# Altium PCB Dash PCB_2020-06-07_18-45-49.pcbdoc
Units mil, origin at the board's own origin, x right, y up, seen from the top; angles counter-clockwise.
Board outline 47335.22 x 35087.44 mil, 2 copper layers (Top Layer, Bottom Layer); 7 components, 14 nets, 54 pads, 15 vias.
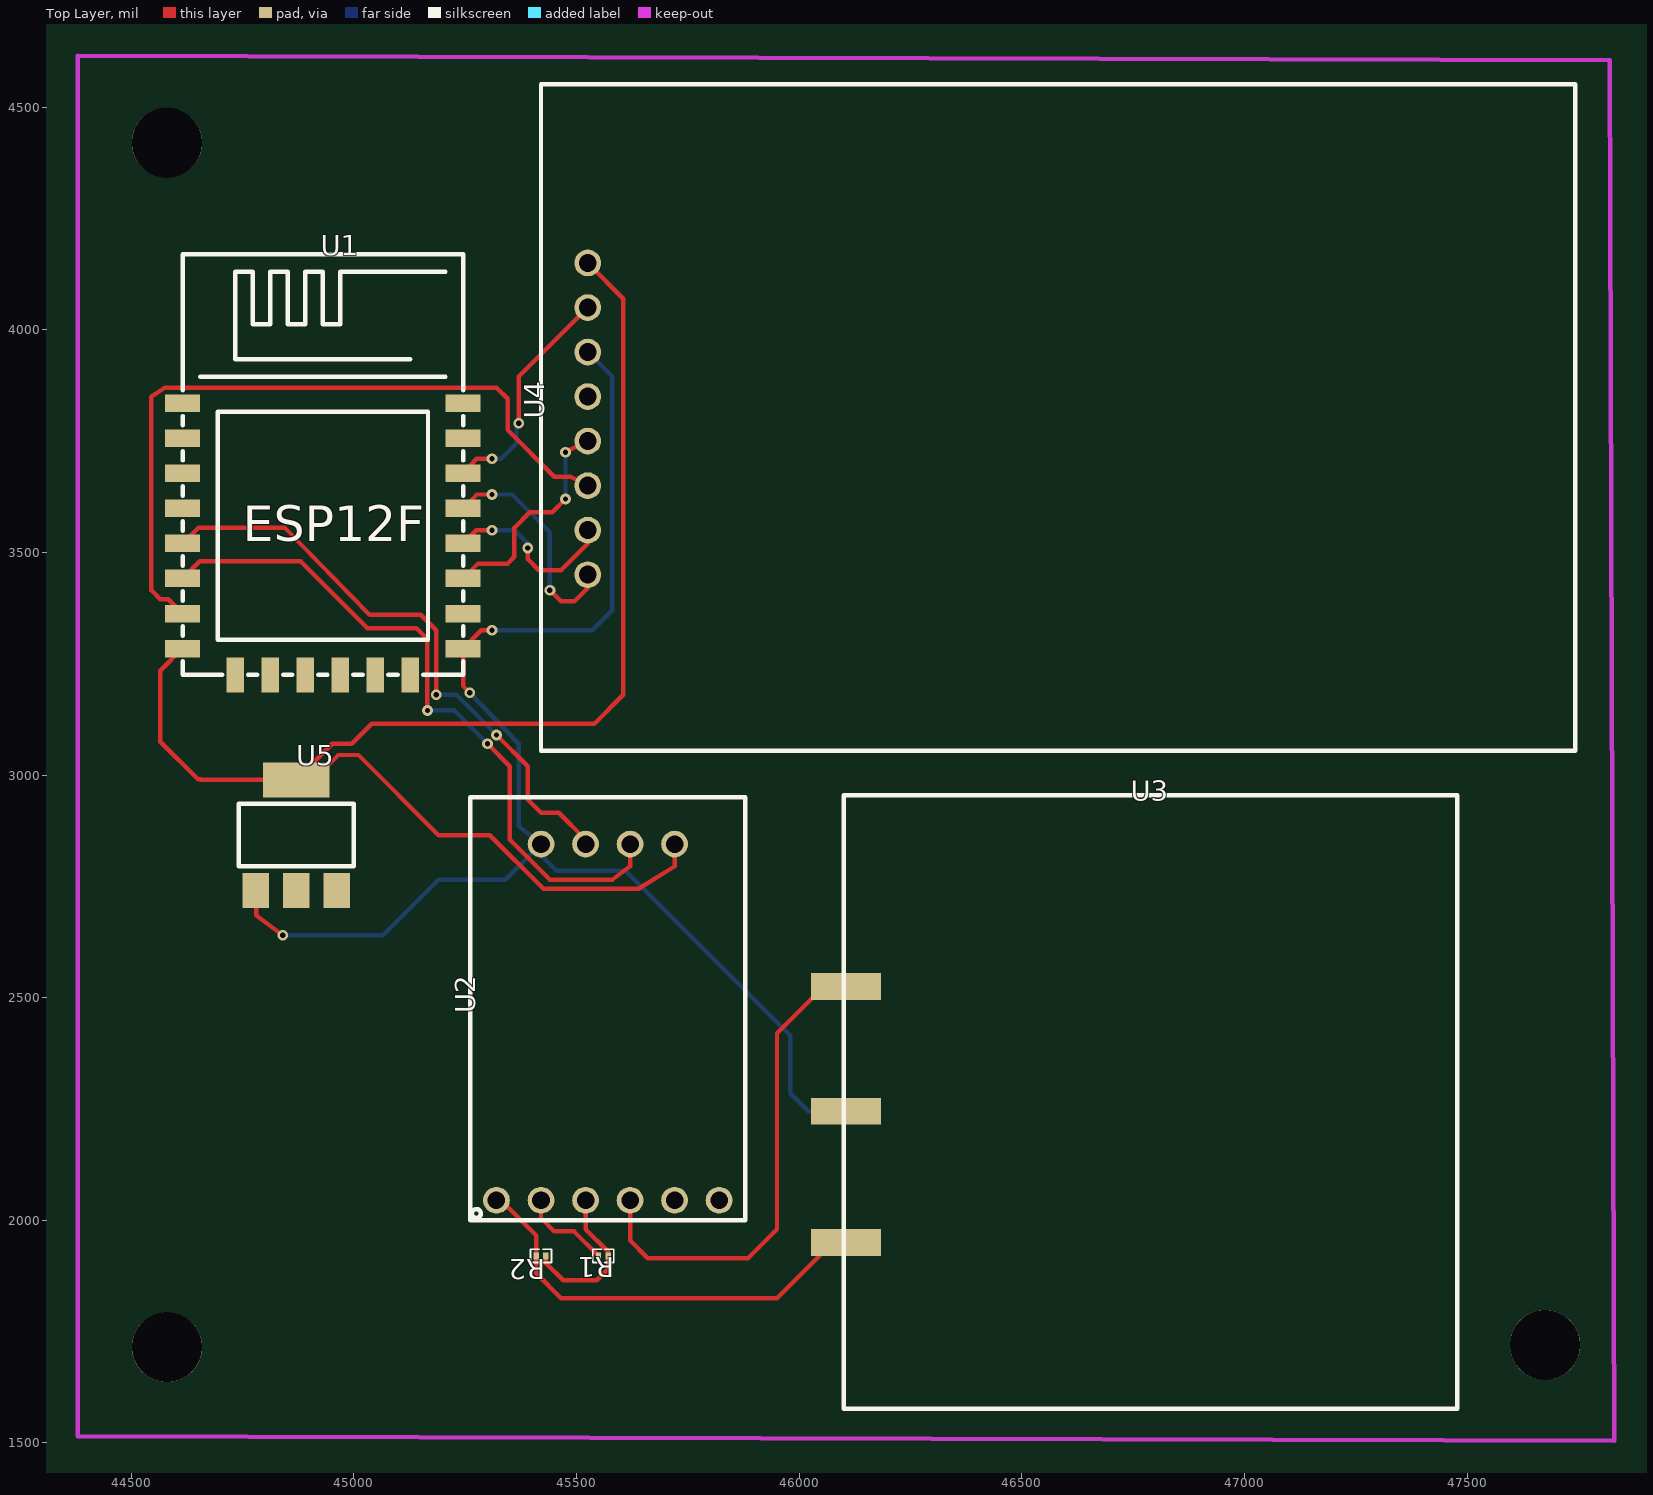
[diagram p0: Top Layer view]
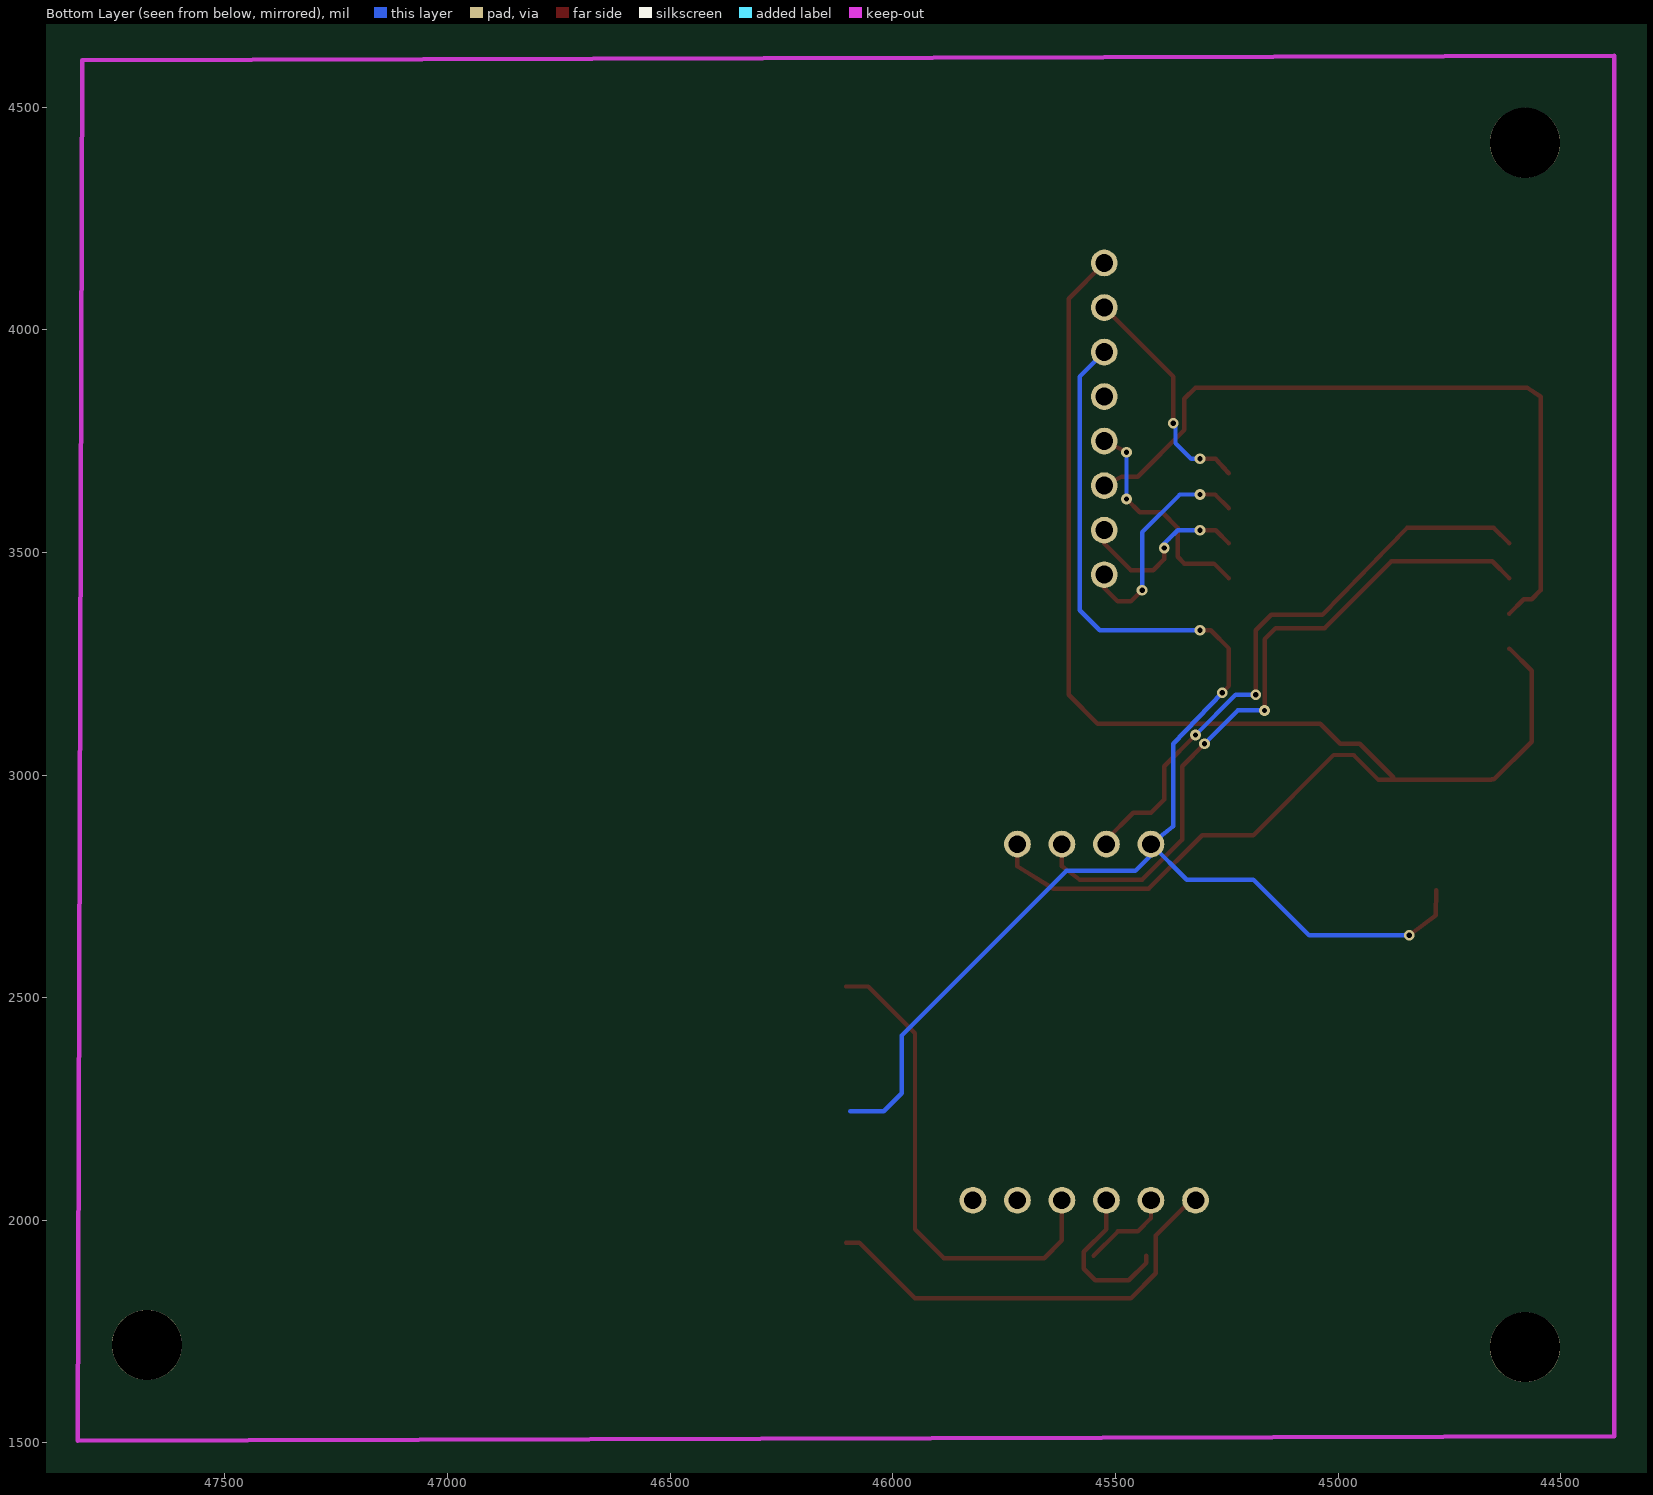
[diagram p1: Bottom Layer view, seen from below]

## Layer stack, top to bottom
Top Layer: signal copper (thickness not stored)
Dielectric: dielectric 12.6, FR-4, Dk 4.8
Bottom Layer: signal copper (thickness not stored)

## Board outline
48335.22,1000 1000,1000 1000,36087.44 48335.22,36087.44

## Components (designator, comment, footprint, x,y, rotation, side; value= is the part's Value field where it differs from the comment)
R1 "1k" R0201 45560.22,1920 r0 top
R2 "1k" R0201 45420.22,1920 r180 top
U1 "ESP-12F(ESP8266MOD)" WIFIM-SMD_ESP-12F-ESP8266MOD 44930.22,3530 r0 top
U2 "XFW-HX711" XFW-HX711 45320.22,2045 r90 top
U3 "Half bridge load cell" "HALF BRIDGE LOAD CELL" 46095.22,2955 r0 top
U4 "RC522" "RC522 RFID MODULE" 45525.22,3450 r90 top
U5 "AMS1117-3.3" AMS_1117 44870.22,2865 r0 top

## Footprints (in the part's own frame and the unit in brackets; to place one, negate y for a bottom-side part, rotate by r counter-clockwise, add the part's x,y. Pads: shape width x height; smd on the part's side, far side on the other; paste and mask are expansions set on the pad)
AMS_1117 [mil]
  rect 59.1x78.7 smd: 1(-91,-124) 3(91,-124) 4(0,-124)
  rect 149.6x78.7 smd: 2(0,124)
  silkscreen extent -129,-70 129,70
"HALF BRIDGE LOAD CELL" [mil]
  rect 157.48x60 smd: 1(10,-430) 2(10,-710) 3(10,-1005)
  silkscreen extent 5,-1378 1383,0
R0201 [mm]
  rect 0.3x0.4 smd: 1(-0.275,0) 2(0.275,0)
  silkscreen extent -0.6,-0.38 0.6,0.38
"RC522 RFID MODULE" [mil]
  round 60 hole 40.16: 1(0,0) 2(100,0) 3(200,0) 4(300,0) 5(400,0) 6(500,0) 7(600,0) 8(700,0)
  silkscreen extent -395,-2218 1101,105
WIFIM-SMD_ESP-12F-ESP8266MOD [mm]
  rect 2x1 smd: 1(-8.002,7.751) 2(-8.002,5.751) 3(-8.002,3.751) 4(-8.002,1.751) 5(-8.002,-0.25) 6(-8.002,-2.25) 7(-8.002,-4.249) 8(-8.001,-6.249) 9(7.999,-6.249) 10(8,-4.249) 11(8.002,-2.25) 12(8.001,-0.25) 13(8,1.751) 14(8.001,3.751) 15(8,5.751) 16(8.001,7.751)
  rect 1x2 smd: 17(-5,-7.751) 18(-3.002,-7.749) 19(-1.003,-7.749) 20(0.998,-7.749) 21(2.997,-7.749) 22(4.997,-7.75)
  silkscreen extent -8,-7.75 8,16.25
XFW-HX711 [mil]
  round 60 hole 39.37: 1(0,0) 2(0,-100) 3(0,-200) 4(0,-300) 5(0,-400) 6(0,-500) 7(800,-400) 8(800,-300) 9(800,-200) 10(800,-100)
  silkscreen extent -45,-558 905,59

## Free pads (board coordinates)
  round 157.48 hole 157.48 unplated: ""(44580.22,1715) ""(44580.22,4420) ""(47675.22,1720)

## Via types
v1: diameter 24, hole 12, Top Layer to Bottom Layer, 15 vias

## Nets (pads, with @x,y where several pads share a name; then routed paths per layer and width w, separated by ;. In a path a pad name is that pad's centre, name@x,y a point inside that pad or via, vN(x,y) a via of type N, cw(c..) or ccw(c..) an arc to the next point about the centre after c; other vN are vias at no path point)
3.3V: U1.8 U2.7 U4.8 U5.2 | length 3440.9
  Top Layer w10: U1.8 44565.22,3233.95 44565.22,3215 44565.22,3075 44650.22,2990 44655.22,2990 44656.22,2989 U5.2 44909.22,2989 44965.22,3045 45010.22,3045 45190.22,2865 45305.22,2865 45425.22,2745 45640.22,2745 45720.22,2795 U2.7 ; U5.2@44876.22,2995 44951.22,3070 44995.22,3070 45040.22,3115 45540.22,3115 45605.22,3180 45605.22,4070 U4.8
D5: U1.5 U2.9 | length 1349.7
  Top Layer w10: U1.5 44650.22,3555 44845.22,3555 45035.22,3360 45150.22,3360 45185.22,3325 v1(45185.22,3180) ; v1(45320.22,3090) 45390.22,3020 45390.22,2945 45420.22,2915 45460.22,2915 45520.22,2855 U2.9
  Bottom Layer w10: v1(45185.22,3180) 45230.22,3180 v1(45320.22,3090)
D12: U1.6 U2.8 | length 1567.5
  Top Layer w10: U1.6 44653.76,3480 44880.22,3480 45030.22,3330 45140.22,3330 45165.22,3305 v1(45165.22,3145) ; v1(45300.22,3070) 45350.22,3020 45350.22,2855 45440.22,2765 45580.22,2765 45620.22,2795 U2.8
  Bottom Layer w10: v1(45165.22,3145) 45225.22,3145 v1(45300.22,3070)
E+: R2.2 U2.1 U3.3 | length 977.7
  Top Layer w10: U2.1 45330.22,2045 45409.4,1965.82 R2.2 45409.4,1880.82 45465.22,1825 45950.22,1825 46075.22,1950 U3.3
GND: U1.9 U2.10 U3.2 U4.6 U5.1 | length 3297.1
  Top Layer w10: U5.1 44780.22,2685 v1(44840.22,2640) ; v1(45260.22,3185) 45245.14,3200.09 U1.9 45286.18,3325 v1(45310.22,3325)
  Bottom Layer w10: v1(44840.22,2640) 45065.22,2640 45190.22,2765 45340.22,2765 U2.10 ; v1(45260.22,3185) 45370.22,3070 45370.22,2885 U2.10 ; v1(45310.22,3325) 45535.22,3325 45580.22,3370 45580.22,3895 U4.6 ; 46095.22,2245 46020.22,2245 45980.22,2285 45980.22,2415 45610.22,2785 45455.22,2785 45420.22,2820 U2.10
MISO: U1.11 U4.4 | length 517.1
  Top Layer w10: U1.11 45278.8,3475 45345.22,3475 45360.22,3490 45360.22,3555 45395.22,3590 45445.22,3590 v1(45475.22,3620) ; v1(45475.22,3725) U4.4 ; U4.4 45520.22,3745 U4.4
  Bottom Layer w10: v1(45475.22,3620) v1(45475.22,3725)
MOSI: U1.7 U4.3 | length 1641.3
  Top Layer w10: U1.7 44582.92,3395 44565.22,3395 44545.22,3415 44545.22,3850 44575.22,3870 45320.22,3870 45345.22,3845 45345.22,3775 45450.22,3670 45485.22,3670 U4.3
RST: U1.14 U4.7 | length 519.9
  Top Layer w10: U1.14 45275.22,3710 v1(45310.22,3710) ; v1(45370.22,3790) 45370.22,3895 U4.7
  Bottom Layer w10: v1(45310.22,3710) 45330.22,3710 45365.22,3745 45365.22,3785 v1(45370.22,3790)
U1_12: U1.12 U4.2 | length 405
  Top Layer w10: U1.12 45275.04,3550 45275.22,3550 v1(45310.22,3550) ; v1(45390.22,3510) 45390.22,3485 45415.22,3460 45465.22,3460 45525.22,3520 U4.2
  Bottom Layer w10: v1(45310.22,3550) 45360.22,3550 45380.22,3530 45390.22,3520 v1(45390.22,3510)
U1_13: U1.13 U4.1 | length 510.9
  Top Layer w10: U1.13 45276.26,3630 v1(45310.22,3630) ; v1(45440.22,3415) 45465.22,3390 45495.22,3390 45525.22,3420 U4.1
  Bottom Layer w10: v1(45310.22,3630) 45355.22,3630 45440.22,3545 v1(45440.22,3415)
U2_2: R1.1 U2.2 | length 204.4
  Top Layer w10: U2.2 45420.22,2005 45450.22,1975 45494.39,1975 R1.1
U2_3: R1.2 R2.1 U2.3 | length 358
  Top Layer w10: R2.1@45431.05,1920 45431.05,1904.17 45470.22,1865 45545.22,1865 45571.04,1890.82 R1.2 45571.04,1929.18 45520.22,1980 U2.3
U2_4: U2.4 U3.1 | length 1102
  Top Layer w10: U2.4 45620.22,1955 45660.22,1915 45885.22,1915 45950.22,1980 45950.22,2420 46055.22,2525 U3.1
VCC: U5.3
pads on no net: U1.1 U1.2 U1.3 U1.4 U1.10 U1.15 U1.16 U1.17 U1.18 U1.19 U1.20 U1.21 U1.22 U2.5 U2.6 U4.5 U5.4

## Silkscreen, mask and mechanical layers (free items; w line width, h text height)
Document:
  lines w0.1: 24666.61,18542.72 24668.61,18544.72

## Text inside footprints (layer, text, board x,y; h text height)
U1: Top Overlay "ESP12F" at 44750.22,3525 h80